# Altium PCB IOT_PCB.PcbDoc
Units mm, origin at the board's own origin, x right, y up, seen from the top; angles counter-clockwise.
Board outline 40 x 40 mm, 2 copper layers (Top Layer, Bottom Layer); 5 components, 11 nets, 39 pads, 2 vias.
Unrouted connection lines stored in the file: 1.
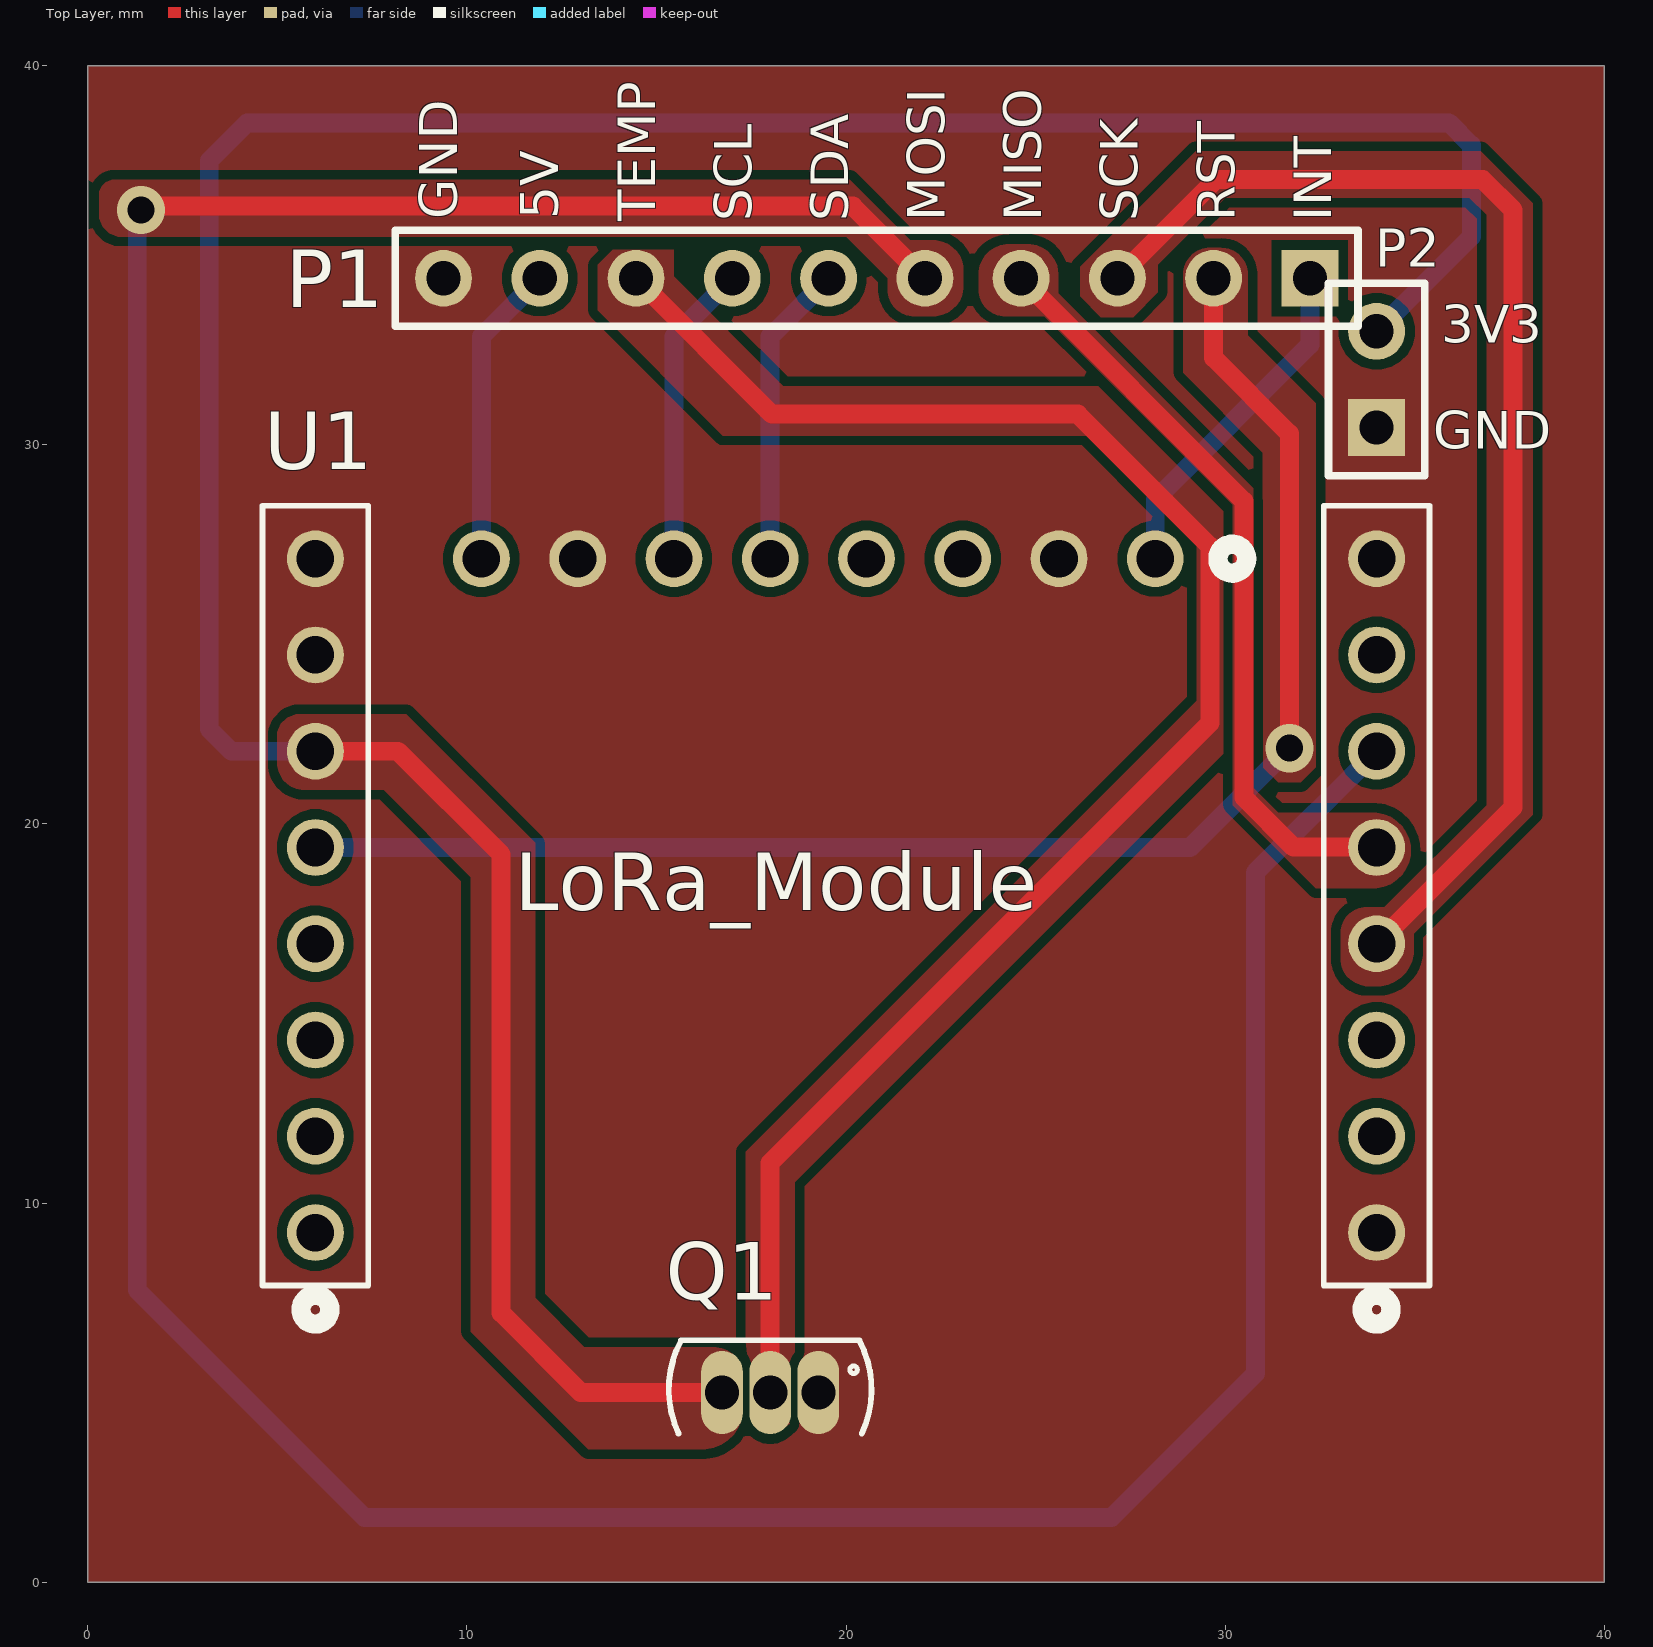
[diagram p0: Top Layer view]
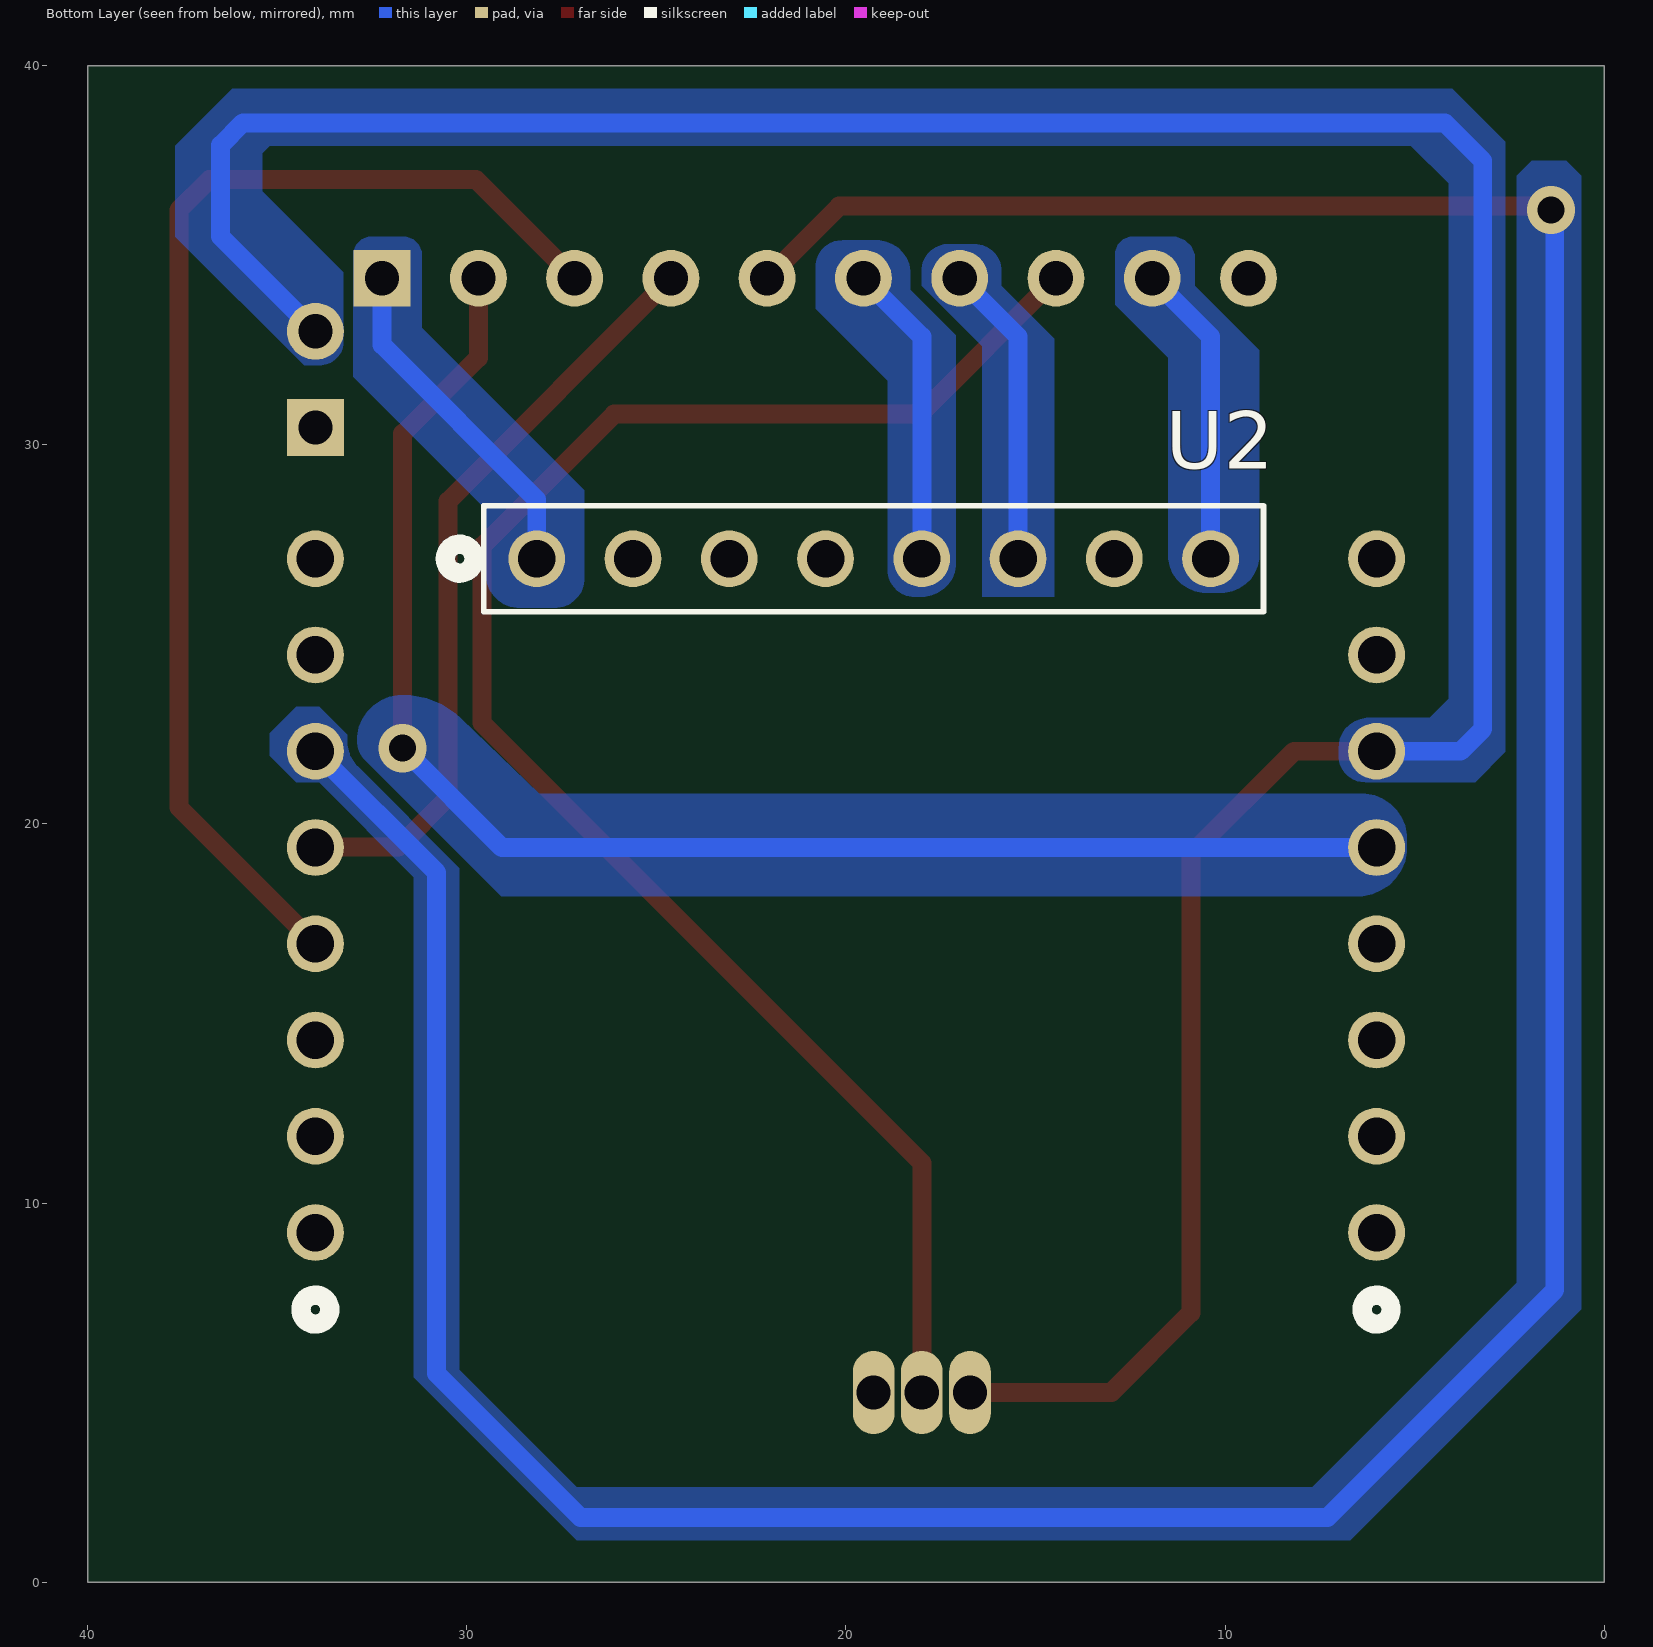
[diagram p1: Bottom Layer view, seen from below]

## Layer stack, top to bottom
Top Solder: solder mask 0.0102, Solder Resist, Dk 3.5
Top Layer: signal copper 0.0356
Dielectric 1: dielectric 0.32, FR-4, Dk 4.8
Bottom Layer: signal copper 0.0356
Bottom Solder: solder mask 0.0102, Solder Resist, Dk 3.5

## Board outline
0,0 40,0 40,40 0,40

## Design rules (kind name [scope] priority, off if disabled: settings)
Clearance [All] p1: gap=0.254 ignorepadtopadclearanceinfootprint=FALSE except(0: Arc-Hole Track-Hole SMDPad-THPad SMDPad-Hole THPad-THPad THPad-Hole Via-Hole Fill-Hole Poly-Hole Region-Hole Text-Hole)
PolygonConnect [All] p1: connectstyle=Direct reliefconductorwidth=0.254 reliefentries=4 polygonreliefangle="90 Angle" airgapwidth=0.254
RoutingVias [All] p1: holewidth=0.711 width=1.27 viastyle="Through Hole" minholewidth=0.711 minwidth=1.27 maxholewidth=0.711 maxwidth=1.27
SolderMaskExpansion [All] p1: expansion=0.102 istentingtop=FALSE
Width [All] p1: maxlimit=3 minlimit=0.1 preferedwidth=0.254
30 further rules are at their usual default settings.

## Components (designator, comment, footprint, x,y, rotation, side; value= is the part's Value field where it differs from the comment)
P1 "Header 10" HDR1X10 32.24,34.4 r180 top
P2 "Header 2" HDR1X2 34,30.46 r90 top
Q1 "DS18B20+PAR" TO-92 18,5 r180 top
U1 "LoRa_ra01" LoRa_pcblib 6,9.22 r0 top locked
U2 "MPU6050" MPU6050 10.38,27 r270 bottom

## Footprints (in the part's own frame and the unit in brackets; to place one, negate y for a bottom-side part, rotate by r counter-clockwise, add the part's x,y. Pads: shape width x height; smd on the part's side, far side on the other; paste and mask are expansions set on the pad)
HDR1X2 [mm] "Connector; Header; 2 Position"
  rect 1.5x1.5 hole 0.9: 1(0,0)
  round 1.5 hole 0.9: 2(2.54,0)
  silkscreen extent -1.27,-1.27 3.81,1.27
HDR1X10 [mm] "Connector; Header; 10 Position"
  rect 1.5x1.5 hole 0.9: 1(0,0)
  round 1.5 hole 0.9: 2(2.54,0) 3(5.08,0) 4(7.62,0) 5(10.16,0) 6(12.7,0) 7(15.24,0) 8(17.78,0) 9(20.32,0) 10(22.86,0)
  silkscreen extent -1.27,-1.27 24.13,1.27
LoRa_pcblib [mil]
  round 59 / inner round 60 / far side round 59 hole 39 paste-29.5 mask+0: 1(0,700) 2(0,600) 3(0,500) 4(0,400) 5(0,300) 6(0,200) 7(0,100) 8(0,0) 9(1102.36,700) 10(1102.36,600) 11(1102.36,500) 12(1102.36,400) 13(1102.36,300) 14(1102.36,200) 15(1102.36,100) 16(1102.36,0)
  silkscreen extent -55,-95 1157,755
MPU6050 [mil]
  round 59 / inner round 60 / far side round 59 hole 39 paste-29.5 mask+0: 1(0,0) 2(0,-100) 3(0,-200) 4(0,-300) 5(0,-400) 6(0,-500) 7(0,-600) 8(0,-700)
  silkscreen extent -55,-795 55,55, body extent -51,-752 549,51, height 229
TO-92 [mm]
  oval 1.1x2.2 hole 0.9: 1(-1.27,0) 2(0,0) 3(1.27,0)
  silkscreen extent -2.68,-1.38 2.67,1.09, body extent -2.28,-1.14 2.28,2.48, height 4.97

## Part data
P1: "Header, 10-Pin", LatestRevisionDate=17-Jul-2002, LatestRevisionNote="Re-released for DXP Platform.", Publisher="Altium Limited"
P2: "Header, 2-Pin", LatestRevisionDate=17-Jul-2002, LatestRevisionNote="Re-released for DXP Platform.", Publisher="Altium Limited"
Q1: "Temperature Sensor Digital, Local -55Â°C ~ 125Â°C 12 b TO-92-3", Package="TO92-3 Maxim", Availability=Warning, Check_prices=https://www.snapeda.com/parts/DS18B20+PAR/Maxim%20Integrated/view-part/104007/?ref=eda, MF="Maxim Integrated", MP=DS18B20+PAR, Price=None, Purchase-URL=https://pricing.snapeda.com/search/part/DS18B20+PAR/?ref=eda, SnapEDA_Link=https://www.snapeda.com/parts/DS18B20+PAR/Maxim%20Integrated/view-part/104007/?ref=snap
U1: library part "Lora module sx1278"
U2: ComponentLink1Description=MAKERS, ComponentLink1URL=https://makerselectronics.com/product/imu-mpu-6050-gyroscope-accelerometer-sensor-module

## Via types
v1: diameter 1.27, hole 0.711, Top Layer to Bottom Layer, 2 vias

## Nets (pads, with @x,y where several pads share a name; then routed paths per layer and width w, separated by ;. In a path a pad name is that pad's centre, name@x,y a point inside that pad or via, vN(x,y) a via of type N, cw(c..) or ccw(c..) an arc to the next point about the centre after c; other vN are vias at no path point)
3V3: P2.2 Q1.3 U1.3 | length 82.8
  Top Layer w0.5: U1.3 8.18,21.92 10.9,19.2 10.9,7.1 13,5 Q1.3
  Bottom Layer w0.5: U1.3 3.786,21.92 3.2,22.506 3.2,37.5 4.2,38.5 35.914,38.5 36.5,37.914 36.5,35.5 P2.2
5V: P1.9 U2.1 | length 8
  Bottom Layer w0.5: U2.1 10.38,32.86 P1.9
GND: P1.10 P2.1 Q1.1 U1.1 U1.2 U1.9 U1.16 U2.2 U2.7
INT: P1.1 U2.8 | length 9.1
  Bottom Layer w0.5: U2.8 28.16,28.56 32.24,32.64 P1.1
MISO: P1.4 U1.12 | length 20.2
  Top Layer w0.5: P1.4 30.5,28.52 30.5,20.7 31.807,19.393 33.987,19.393 U1.12
MOSI: P1.5 U1.11 | length 101.4
  Top Layer w0.5: v1(1.4,36.2) 1.5,36.3 20.18,36.3 P1.5
  Bottom Layer w0.5: v1(1.4,36.2) 1.3,36.1 1.3,7.7 7.3,1.7 27,1.7 30.8,5.5 30.8,18.72 U1.11
RST: P1.2 U1.4 | length 40.1
  Top Layer w0.5: P1.2 29.7,32.3 31.7,30.3 v1(31.7,22)
  Bottom Layer w0.5: U1.4 29.08,19.38 v1(31.7,22) v1@31.7,21.927
SCK: P1.3 U1.13 | length 32.7
  Top Layer w0.5: P1.3 29.76,37 36.8,37 37.6,36.2 37.6,20.44 U1.13
SCL: P1.7 U2.3 | length 8
  Bottom Layer w0.5: U2.3 15.46,32.86 P1.7
SDA: P1.6 U2.4 | length 8
  Bottom Layer w0.5: U2.4 18,32.86 P1.6
TEMP_SENS: P1.8 Q1.2 | length 45.2
  Top Layer w0.5: P1.8 18.045,30.815 26.118,30.815 29.6,27.332 29.6,22.659 18,11.059 Q1.2
pads on no net: U1.5 U1.6 U1.7 U1.8 U1.10 U1.14 U1.15 U2.5 U2.6

## Polygon pours and split planes (outlines as drawn)
3V3 on Bottom Layer "3V3_L02_P006" (solid, pour order 6): 7,22 7,21.8 cw(c6.3,21.8) 6.3,21.1 3.4,21.1 2.6,21.9 2.6,38 4,39.4 36.2,39.4 37.7,37.9 37.7,35.5 34.3,32.1 33.9,32.1 cw(c33.9,32.75) 33.25,32.75 33.25,34.55 35.4,36.7 35.4,37.7 35.2,37.9 5.1,37.9 4.1,36.9 4.1,23.3 4.6,22.8 6.2,22.8 cw(c6.2,22)
5V on Bottom Layer "5V_L02_P005" (solid, pour order 5): 10.8,34.9 10.8,34.2 9.1,32.5 9.1,27.1 ccw(c10.1,27.1) 10.1,26.1 10.5,26.1 ccw(c10.5,27.1) 11.5,27.1 11.5,32.3 12.9,33.7 12.9,35 ccw(c12.4,35) 12.4,35.5 11.4,35.5 ccw(c11.4,34.9)
SCL on Bottom Layer "SCL_L02_P004" (solid, pour order 4): 15.9,34.6 15.9,34.2 14.5,32.8 14.5,26 16.4,26 16.4,32.6 18,34.2 18,34.6 ccw(c17.3,34.6) 17.3,35.3 16.6,35.3 ccw(c16.6,34.6)
SDA on Bottom Layer "SDA_L02_P003" (solid, pour order 3): 18,26 18.2,26 ccw(c18.2,26.7) 18.9,26.7 18.9,31.7 20.8,33.6 20.8,34.7 ccw(c20.1,34.7) 20.1,35.4 19.2,35.4 ccw(c19.2,34.5) 18.3,34.5 18.3,34.1 17.1,32.9 17.1,27.5 17.1,26.9 ccw(c18,26.9)
INT on Bottom Layer "INT_L02_P002" (solid, pour order 2): 31.2,35 31.2,33.1 26.9,28.8 26.9,26.5 ccw(c27.7,26.5) 27.7,25.7 28.6,25.7 ccw(c28.6,26.6) 29.5,26.6 29.5,28.3 33,31.8 33,35 ccw(c32.5,35) 32.5,35.5 31.7,35.5 ccw(c31.7,35)
MOSI on Bottom Layer "MOSI_L02_P001" (solid, pour order 1): 34.5,21.1 33.9,21.1 31.4,18.6 31.4,5.4 27.1,1.1 6.7,1.1 0.6,7.2 0.6,37.1 1,37.5 1.9,37.5 2.3,37.1 2.3,7.9 7.7,2.5 27.1,2.5 30.2,5.6 30.2,18.9 33.1,21.8 33.1,22.3 33.9,23.1 34.5,23.1 35.2,22.4 35.2,21.8
RST on Bottom Layer "RST_L02_P000" (solid, pour order 0): 6.5,18.1 29.1,18.1 32.688,21.688 ccw(c32.176,22.2) 32.9,22.2 ccw(c31.7,22.2) 31.7,23.4 ccw(c31.7,21.168) 30.152,22.776 28.1,20.8 6.4,20.8 ccw(c6.4,19.6) 5.2,19.6 5.2,19.4 ccw(c6.5,19.4)
GND on Top Layer "GND_L01_P016" (solid, pour order 16): 0,0 40,0 40,40 0,40
MOSI on Top Layer "MOSI_L01_P015" (solid, pour order 15): 22.3,33.4 21.8,33.4 cw(c21.8,34.1) 21.1,34.1 21.1,34.4 20,35.5 1.9,35.5 0.9,35.5 cw(c0.9,36.1) 0.3,36.1 0.3,36.6 cw(c0.7,36.6) 0.7,37 20.1,37 21.7,35.4 22.3,35.4 cw(c22.3,34.6) 23.1,34.6 23.1,34.2 cw(c22.3,34.2)
SCK on Top Layer "SCK_L01_P014" (solid, pour order 14): 33.775,15.725 34.025,15.725 ccw(c34.025,16.675) 34.975,16.675 34.975,17.1 38.125,20.25 38.125,36.375 36.75,37.75 29.225,37.75 26.175,34.7 26.175,33.925 26.725,33.375 27.575,33.375 28.225,34.025 28.225,34.75 30,36.525 36.45,36.525 36.9,36.075 36.9,20.5 34.2,17.8 33.725,17.8 ccw(c33.725,17.125) 33.05,17.125 33.05,16.45 ccw(c33.775,16.45)
MISO on Top Layer "MISO_L01_P013" (solid, pour order 13): 34.9,19.3 cw(c33.9,19.3) 33.9,18.3 32.4,18.3 30.2,20.5 30.2,28.425 25.225,33.4 24.2,33.4 cw(c24.2,34.1) 23.5,34.1 23.5,34.5 cw(c24.3,34.5) 24.3,35.3 24.8,35.3 cw(c24.8,34.5) 25.6,34.5 25.6,34 30.75,28.85 30.75,20.95 31.4,20.3 33.9,20.3 cw(c33.9,19.3)
RST on Top Layer "RST_L01_P011" (solid, pour order 11): 31,21.5 31.4,21.1 32,21.1 32.4,21.5 32.4,31.1 30.6,32.9 30.6,34.5 ccw(c29.9,34.5) 29.9,35.2 29.6,35.2 ccw(c29.6,34.5) 28.9,34.5 28.9,31.9 31,29.8
TEMP_SENS on Top Layer "TEMP_SENS_L01_P008" (solid, pour order 8): 18.15,4.05 ccw(c18.2,4.5) 18.65,4.45 18.65,10.55 29.95,21.85 29.95,28.25 26.65,31.55 18.35,31.55 15.45,34.45 15.45,35.15 13.85,35.15 13.45,34.75 13.45,33.55 16.75,30.25 25.55,30.25 26.35,30.25 29.25,27.35 29.25,23.25 17.35,11.35 17.35,6.45 17.35,6.35 17.55,4.65 ccw(c18.15,4.65)
3V3 on Top Layer "3V3_L01_P007" (solid, pour order 7): 17.275,5.425 17.275,4.575 cw(c16.2,4.575) 16.2,3.5 13.2,3.5 10.1,6.6 10.1,18.6 7.8,20.9 5.7,20.9 cw(c5.7,21.6) 5,21.6 5,22.3 cw(c5.6,22.3) 5.6,22.9 8.4,22.9 11.8,19.5 11.8,7.5 13.1,6.2 16.5,6.2 cw(c16.5,5.425)

## Silkscreen, mask and mechanical layers (free items; w line width, h text height)
Top Overlay:
  text "GND" at 9.746,35.954 h1 r90
  text "5V" at 12.412,35.954 h1 r90
  text "TEMP" at 14.961,35.9 h0.99 r90
  text "SCL" at 17.509,35.9 h0.99 r90
  text "SDA" at 20.058,35.9 h0.99 r90
  text "MOSI" at 22.606,35.9 h0.99 r90
  text "MISO" at 25.155,35.9 h0.99 r90
  text "SCK" at 27.703,35.9 h0.99 r90
  text "RST" at 30.252,35.9 h0.99 r90
  text "INT" at 32.8,35.9 h0.99 r90
  text "3V3" at 35.7,32.7 h0.99
  text "GND" at 35.5,29.9 h0.99

## Text inside footprints (layer, text, board x,y; h text height)
U1: Top Overlay "LoRa_Module" at 11.254,17.728 h1.52